# EAGLE board m0xpdLooping ADSR v2.0 (EAGLE 9.6.2)
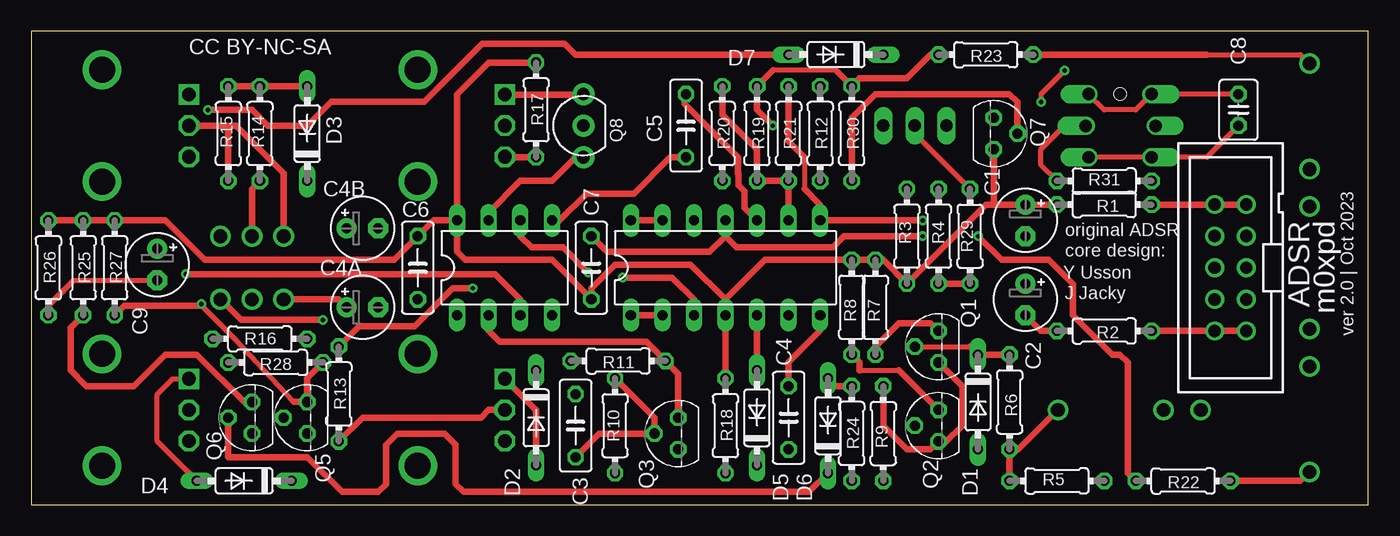
[diagram p0: board, top side]
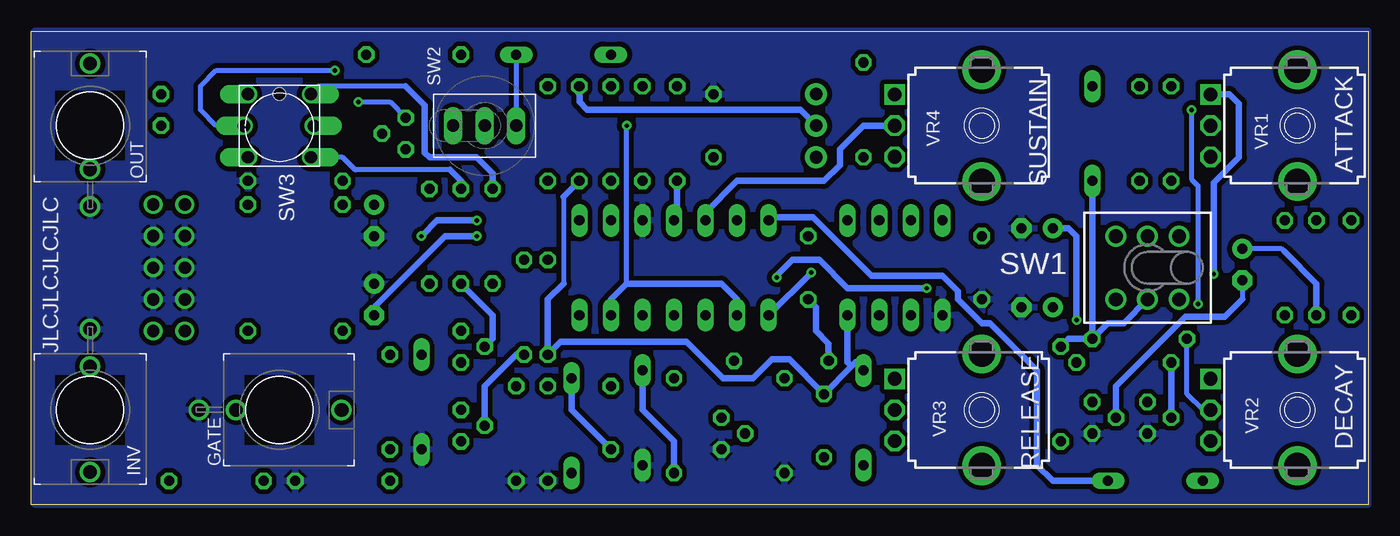
[diagram p1: board, bottom side, seen from below]

Size 107.62 x 38.09 mm. Coordinates in mm from the lower left corner, seen from the top.
Outline: 0,0 107.62,0 107.62,38.09 0,38.09 0,0
Copper layers (1*16): Top 0.035mm / dielectric 1.5mm / Bottom 0.035mm
Design rules "default *": minimum track width 6mil, minimum drill 0.35mm, track to track 15mil, track to pad 15mil, pad to pad 6mil, via to via 6mil, smd to smd 6mil, copper to edge 0mil, drill to drill 6mil, minimum pad ring 10mil, minimum via ring 8mil, stop-mask expansion 4mil, vias tented up to drill 0mil, thermal gap 10mil

## Footprints (pad centres in the part's own frame; a part is rotated, then mirrored left to right if it is on the bottom)
E2,5-5 = drill 0.813 pad 1.6: + -1.27,0 | drill 0.813 pad 1.6 octagon: - 1.27,0
C050-025X075 = drill 0.813 octagon: 1 -2.54,0; 2 2.54,0
C025-030X050 = drill 0.813 octagon: 1 -1.27,0; 2 1.27,0
DO35-7 = drill 0.813 long: A 3.81,0; C -3.81,0
WQP-PJ301M-12_JACK = drill 1.1: P$1_TIP 0,5; P$2_SWITCH 0,-3.5; P$3_SLEEVE 0,-6.5
DIL14 = drill 0.813 long: 1 -7.62,-3.81; 2 -5.08,-3.81; 3 -2.54,-3.81; 4 0,-3.81; 5 2.54,-3.81; 6 5.08,-3.81; 7 7.62,-3.81; 8 7.62,3.81; 9 5.08,3.81; 10 2.54,3.81; 11 0,3.81; 12 -2.54,3.81; 13 -5.08,3.81; 14 -7.62,3.81
DIL08 = drill 0.813 pad 1.27 long: 1 -3.81,-3.81; 2 -1.27,-3.81; 3 1.27,-3.81; 4 3.81,-3.81; 5 3.81,3.81; 6 1.27,3.81; 7 -1.27,3.81; 8 -3.81,3.81
TO92 = drill 0.813 octagon: 1 1.27,0; 2 0,1.905; 3 -1.27,0
TO92' = drill 1.016 pad 1.778: 1 -2.54,0; 2 0,0; 3 2.54,0
0204/7 = drill 0.813 octagon: 1 -3.81,0; 2 3.81,0
TL4XPO = drill 1.1 pad 1.676: 1 -2.54,2.54; 2 0,2.54; 3 2.54,2.54; 4 -2.54,-2.54; 5 0,-2.54; 6 2.54,-2.54
SUBMINI_TOGGLE = drill 1 pad 1.422 long: 1 -2.54,0; 3 2.54,0; COM 0,0
LOW_PROFILE_BUTTON = drill 1 offset: L$1 -2.875,-0.02; L$2 2.76,-0.02; P$1 2.54,-2.54; P$2 -2.54,-2.54; P$3 2.54,2.54; P$4 -2.54,2.54 | hole 1: 0,2.54
9MM_SNAP-IN_POT = drill 1.1 square: 1 -2.5,-7 | drill 1.1 octagon: 2 0,-7; 3 2.5,-7 | drill 2.1 pad 2.794: CHASSIS1 -4.5,0; CHASSIS2 4.5,0
PAK100/2500-10 = drill 1 pad 1.422: 1 -5.08,-1.27; 2 -5.08,1.27; 3 -2.54,-1.27; 4 -2.54,1.27; 5 0,-1.27; 6 0,1.27; 7 2.54,-1.27; 8 2.54,1.27; 9 5.08,-1.27; 10 5.08,1.27

## Placement (x,y rotation side)
C1  22u  [E2,5-5]  80.01,22.86 270 top
C2  22u  [E2,5-5]  80.01,16.51 270 top
C3  10n  [C050-025X075]  43.81,6.35 270 top
C4  100n  [C050-025X075]  60.96,6.99 90 top
C4A  10u  [E2,5-5]  26.67,15.88 0 top
C4B  1u  [E2,5-5]  26.67,22.23 0 top
C5  10n  [C050-025X075]  52.7,30.48 270 top
C6  100n  [C050-025X075]  31.11,19.05 270 top
C7  100n  [C050-025X075]  45.09,19.05 90 top
C8  100n  [C025-030X050]  97.16,31.75 270 top
C9  1u  [E2,5-5]  10.16,19.3 270 top
D1  1N4148DO35-7  [DO35-7]  76.2,8.26 270 top
D2  1N4148DO35-7  [DO35-7]  40.64,6.99 270 top
D3  1N4148DO35-7  [DO35-7]  22.23,29.84 90 top
D4  1N4148DO35-7  [DO35-7]  17.14,1.91 180 top
D5  1N4148DO35-7  [DO35-7]  58.42,6.99 90 top
D6  1N4148DO35-7  [DO35-7]  64.14,6.35 90 top
D7  1N4148DO35-7  [DO35-7]  64.77,36.2 180 top
GATE  THONKICONNNEW  [WQP-PJ301M-12_JACK]  87.63,7.62 270 bottom
IC1  TL074P  [DIL14]  55.88,19.05 0 top
IC2  7555  [DIL08]  38.1,19.05 0 top
INV  THONKICONNNEW  [WQP-PJ301M-12_JACK]  102.87,7.62 180 bottom
OUT  THONKICONNNEW  [WQP-PJ301M-12_JACK]  102.87,30.48 0 bottom
Q1  2N3904  [TO92]  73.03,12.7 90 top
Q2  2N3904  [TO92]  73.03,6.35 90 top
Q3  2N3904  [TO92]  52.07,5.71 90 top
Q5  2N3904  [TO92]  22.23,6.99 90 top
Q6  2N3904  [TO92]  17.78,6.99 90 top
Q7  2N3904  [TO92]  77.47,29.84 270 top
Q8  2N7000  [TO92']  44.45,30.48 90 top
R1  10  [0204/7]  86.36,24.13 0 top
R2  10  [0204/7]  86.36,13.97 0 top
R3  10k  [0204/7]  70.48,21.59 90 top
R4  47k  [0204/7]  73.03,21.59 90 top
R5  1M2  [0204/7]  82.55,1.91 180 top
R6  100k  [0204/7]  78.74,8.26 270 top
R7  22k  [0204/7]  67.94,15.88 270 top
R8  22k  [0204/7]  66.04,15.88 270 top
R9  10  [0204/7]  68.58,5.71 270 top
R10  22k  [0204/7]  46.99,6.35 270 top
R11  22k  [0204/7]  47.24,11.56 0 top
R12  1M  [0204/7]  63.5,29.84 90 top
R13  100  [0204/7]  24.77,8.89 90 top
R14  120  [0204/7]  18.41,29.84 90 top
R15  680  [0204/7]  15.88,29.84 90 top
R16  100  [0204/7]  18.41,13.34 0 top
R17  4k7  [0204/7]  40.64,31.75 90 top
R18  68k  [0204/7]  55.88,6.35 90 top
R19  100k  [0204/7]  58.42,29.84 90 top
R20  150k  [0204/7]  55.63,29.84 90 top
R21  100k  [0204/7]  60.96,29.84 90 top
R22  1k  [0204/7]  92.71,1.91 0 top
R23  1k  [0204/7]  76.83,36.2 0 top
R24  10k  [0204/7]  66.04,5.71 90 top
R25  10k  [0204/7]  4.19,19.05 90 top
R26  150k  [0204/7]  1.4,19.05 90 top
R27  10k  [0204/7]  6.73,19.05 90 top
R28  10k  [0204/7]  19.68,11.43 180 top
R29  2k2  [0204/7]  75.56,21.59 270 top
R30  12k  [0204/7]  66.04,29.84 90 top
R31  2k2  [0204/7]  86.36,26.04 180 top
SW1  TL46PO  [TL4XPO]  17.78,19.05 180 bottom
SW2  SUBMINI_SPDT  [SUBMINI_TOGGLE]  71.12,30.48 0 bottom
SW3  THONK_LED_BUTTON  [LOW_PROFILE_BUTTON]  87.63,30.48 0 bottom
VR1  1MLOG  [9MM_SNAP-IN_POT]  5.71,30.48 270 bottom
VR2  1MLOG  [9MM_SNAP-IN_POT]  5.71,7.62 270 bottom
VR3  1MLOG  [9MM_SNAP-IN_POT]  31.11,7.62 270 bottom
VR4  10kLIN  [9MM_SNAP-IN_POT]  31.11,30.48 270 bottom
X1  2510-  [PAK100/2500-10]  96.52,19.05 90 top

## Library data of the parts
C1-C4 C4A C4B C5-C9 = rcl; SPICEPREFIX: C
D1-D7 = diode
GATE INV OUT VR1-VR4 = MusicThingModular
IC1 = linear
IC2 SW2 SW3 = MyLibrary
Q1-Q3 Q5-Q7 = transistor-npn
Q8 = transistors-FET
R1-R31 = rcl; SPICEPREFIX: R
SW1 = switch
X1 = con-3m; MF: 3M; MPN: 2510-6002UB; OC_FARNELL: 9838244; OC_NEWARK: 46F4725

## Nets
+12V: C1.+ C6.1 C7.1 IC1.4 IC2.8 Q7.1 R1.1 R3.1 R7.1 R8.1 R11.1 R17.2 R18.2 R25.2 R26.2 R27.2
-12V: C2.- C7.2 IC1.11 R2.1 R20.1
GND: C1.- C2.+ C4A.- C4B.- C5.1 C6.2 D1.A D5.C GATE.P$3_SLEEVE IC1.10 IC2.1 INV.P$3_SLEEVE OUT.P$3_SLEEVE Q3.3 Q5.3 Q6.3 R5.1 R9.2 R10.2 R24.1 R31.1 X1.3 X1.4 X1.5 X1.6 X1.7 X1.8
LED+: Q7.3 SW3.L$1
LED-: R31.2 SW3.L$2
N$1: R1.2 X1.9 X1.10
N$2: GATE.P$1_TIP R5.2 R6.2
N$3: D1.C Q1.2 R4.1 R6.1 R29.2
N$4: Q1.3 Q2.3 R9.1
N$5: R2.2 X1.1 X1.2
N$6: IC2.3 VR1.1
N$7: Q1.1 Q2.2 R7.2
N$8: C3.2 Q3.2 R10.1
N$9: IC2.2 Q3.1 R11.2
N$10: C5.2 IC2.5
N$11: C3.1 D2.C IC2.4 Q2.1 R8.2 R12.1
N$12: Q8.2 R12.2
N$13: IC2.7 Q8.1
N$14: D2.A VR3.1
N$15: Q8.3 VR4.1
N$16: R17.1 VR4.3
N$17: R13.1 VR3.2
N$18: R15.1 SW1.6 VR1.2
N$19: R14.1 SW1.5
N$20: D3.A R14.2 R15.2
N$21: D3.C IC1.3 R13.2 R16.2 SW1.2
N$22: R16.1 VR2.2
N$23: C4A.+ SW1.3
N$24: C4B.+ SW1.1
N$25: IC1.1 IC1.2 IC1.6 IC2.6 R19.2 R23.1 R30.2
N$26: IC1.12 VR4.2
N$27: D4.C IC1.13 IC1.14
N$28: D4.A VR2.1
N$29: D5.A IC1.5 R18.1
N$30: IC1.9 R19.1 R20.2 R21.1
N$31: C4.2 IC1.7
N$32: IC1.8 R21.2 R22.1
N$33: INV.P$1_TIP R22.2
N$34: OUT.P$1_TIP R23.2
N$35: C8.1 R3.2 SW3.P$3 SW3.P$4
N$36: C8.2 R4.2 SW3.P$1 SW3.P$2
N$37: C4.1 D6.A R24.2
N$38: D7.A Q5.1 R27.1 R28.1
N$39: C9.+ Q6.1 R25.1
N$40: R29.1 SW2.COM
N$41: C9.- Q5.2 R26.1
N$42: D7.C SW2.3
N$43: D6.C Q6.2 R28.2
N$45: Q7.2 R30.1

## Tracks (layer width: path | path; a pad name or v marks a point on that pad's centre or on a via)
+12V
  Top 0.508: 55.88,16.51 53.09,19.3 46.99,19.3 45.09,17.4 C7.1 41.91,19.68 34.92,19.68 34.29,20.32 IC2.8 | 77.47,24.13 C1.+ R1.1 | 77.47,24.13 76.83,24.13 R3.1 68.58,19.68 R7.1 R8.1 59.05,19.68 55.88,16.51 | 55.88,16.51 IC1.4 R18.2 | R26.2 R25.2 R27.2 10.79,22.86 13.97,19.68 29.21,19.68 C6.1 32.38,22.86 IC2.8 | R17.2 36.83,35.56 34.29,33.02 IC2.8 | Q7.1 77.47,24.13
  Bottom 0.508: C7.1 44.45,15.88 44.45,13.97 43.43,12.95 R11.1
-12V  (via drill 0.35)
  Top 0.508: R2.1 81.28,13.97 C2.- | 55.88,21.59 54.61,20.32 46.35,20.32 C7.2 | IC1.11 55.88,21.59 | 55.88,21.59 56.77,20.7 64.52,20.7 65.41,21.59 v71.75,21.59
  Bottom 0.508: R20.1 55.63,23.11 IC1.11 | v71.75,21.59 74.3,21.59 80.01,15.88 C2.-
GND
  Top 0.508: IC1.10 57.4,23.88 57.4,25.22 56.92,25.7 56.92,26.57 56.9,26.6 56.9,27.94 52.58,32.26 52.58,32.89 C5.1
  pour Bottom: 0,38.1 107.31,38.1 107.31,0 0,0
LED+  (via drill 0.35)
  Top 0.406: v83.19,34.92 81.28,33.02 v81.28,32.38
  Bottom 0.406: SW3.L$1 90.53,30.48 92.71,30.48 93.98,31.75 93.98,33.66 92.71,34.92 v83.19,34.92 | v81.28,32.38 78.74,32.38 Q7.3
LED-
  Top 0.406: R31.2 81.28,27.3 81.28,28.57 83.17,30.46 SW3.L$2
N$1
  Top 0.508: X1.9 X1.10 R1.2
N$2
  Top 0.508: GATE.P$1_TIP 79.45,4.45 78.82,4.45 | 78.82,4.45 R6.2 | R5.2 78.74,4.37 78.82,4.45
N$3
  Top 0.406: Q1.2 75.56,12.7
  Top 0.508: R4.1 R29.2 | 75.56,12.7 D1.C R6.1
  Bottom 0.508: Q1.2 70.48,13.34 70.48,15.24 R4.1
N$4
  Top 0.508: Q1.3 74.93,9.53 74.93,6.35 73.66,5.08 Q2.3 72.39,4.45 70.48,4.45 68.58,6.35 R9.1
N$5
  Top 0.508: X1.1 X1.2 R2.2
N$6  (via drill 0.35)
  Top 0.508: IC2.3 39.37,16.51 37.34,18.54 v12.45,18.54
  Bottom 0.508: v12.45,18.54 12.45,25.91 10.41,27.94 10.41,32.26 11.18,33.02 12.45,33.02 12.49,32.98 VR1.1
N$7
  Top 0.508: R7.2 67.94,12.7 69.85,14.61 72.39,14.61 Q1.1
  Bottom 0.508: R7.2 68.58,12.06 71.12,9.53 Q2.2
N$8
  Top 0.508: C3.2 45.72,5.71 Q3.2 50.16,6.99 R10.1
N$9
  Top 0.508: Q3.1 52.07,10.54 R11.2 49.53,13.08 37.72,13.08 36.83,13.97 IC2.2
N$10
  Top 0.508: IC2.5 42.55,22.86 44.7,25.02 48.51,25.02 51.44,27.94 C5.2
N$11
  Top 0.406: 66.67,10.79 69.85,10.79
  Top 0.508: R8.2 66.67,11.43 66.67,10.79 | 69.85,10.79 Q2.1
  Bottom 0.406: 64.77,24.77 64.77,17.78
  Bottom 0.508: D2.C 41.27,11.43 41.59,11.11 | 41.59,11.11 41.91,11.43 IC2.4 | 41.59,11.11 C3.1 46.61,11.68 48.01,11.68 49.53,10.16 51.94,10.16 54.86,13.08 65.02,13.08 R8.2 66.04,16.51 64.77,17.78 | R12.1 64.77,24.77
N$12
  Bottom 0.508: Q8.2 45.72,31.75 62.87,31.75 63.5,32.38 R12.2
N$13
  Top 0.508: IC2.7 36.83,23.5 39.37,26.04 41.91,26.04 43.81,27.94 Q8.1
N$14
  Top 0.508: VR3.1 40.62,7.62 40.64,7.62 D2.A
N$15
  Top 0.508: VR4.1 44.41,32.98 Q8.3
N$16
  Top 0.508: R17.1 38.16,27.94 VR4.3
N$17
  Top 0.508: R13.1 26.67,6.99 36.2,6.99 36.83,7.62 VR3.2
N$18
  Top 0.508: SW1.6 20.32,26.67 16.51,30.48 15.88,30.48 | 15.88,30.48 VR1.2 | R15.1 15.88,30.48
N$19
  Top 0.508: SW1.5 17.78,25.4 R14.1
N$20
  Top 0.508: D3.A R14.2 R15.2
N$21  (via drill 0.35)
  Top 0.508: R13.2 26.42,14.35 30.86,14.35 33.91,17.4 v35.56,17.4 | v47.62,18.27 51.59,18.27 53.34,16.51 IC1.3
  Bottom 0.508: D3.C R16.2 | SW1.2 19.68,14.61 20.95,14.61 R16.2 | R16.2 24.13,13.34 R13.2 | v35.56,17.4 41.91,17.4 44.2,19.68 46.35,19.68 47.62,18.41 v47.62,18.27
N$22
  Bottom 0.406: 13.34,7.62 14.61,8.89 R16.1
  Bottom 0.508: VR2.2 13.34,7.62
N$23
  Top 0.508: SW1.3 24.77,16.51 C4A.+
N$24  (via drill 0.35)
  Top 0.508: v23.5,14.86 16.89,14.86 SW1.1
  Bottom 0.508: C4B.+ 24.13,22.23 23.5,21.59 v23.5,14.86
N$25  (via drill 0.35)
  Top 0.406: 64.77,34.92 59.69,34.92
  Top 0.508: IC1.1 IC1.2 | 59.69,34.92 R19.2 58.42,31.75 v59.69,30.48 | 64.77,34.92 R30.2 66.67,34.29 70.48,34.29 72.39,36.2 R23.1 | IC2.6 39.37,21.59 40.26,20.7 42.8,20.7 v44.83,18.67
  Bottom 0.406: 59.69,17.78 v59.69,30.48
  Bottom 0.508: IC1.2 50.8,16.51 52.07,17.78 59.69,17.78 60.96,16.51 IC1.6 | v44.83,18.67 IC1.1
N$26
  Bottom 0.508: VR4.2 40.64,30.48 42.55,28.57 42.55,27.3 43.81,26.04 50.8,26.04 53.34,23.5 IC1.12
N$27
  Top 0.508: IC1.13 IC1.14
  Bottom 0.508: IC1.14 48.01,23.11 44.7,23.11 40.01,18.41 34.29,18.41 33.02,17.14 33.02,16.51 31.11,14.61 30.48,14.61 26.67,10.79 26.67,3.17 25.4,1.91 D4.C
N$28
  Top 0.406: 12.71,2.52 10.16,5.08 10.16,8.89 11.39,10.12 VR2.1
  Top 0.508: D4.A 12.71,2.52
N$29
  Top 0.508: IC1.5 D5.A
  Bottom 0.508: D5.A 58.42,7.62 55.88,5.08 R18.1
N$30
  Top 0.508: IC1.9 R21.1 R19.1 58.42,28.57 55.63,31.37 R20.2
N$31
  Top 0.508: C4.2 60.96,11.43 63.5,13.97 IC1.7
N$32  (via drill 0.35)
  Top 0.406: 62.23,27.94 62.23,25.4
  Top 0.508: v71.75,22.86 IC1.8 63.5,24.13 62.23,25.4 | v76.2,21.59 78.11,19.68 81.92,19.68 83.82,17.78 83.82,15.24 87,12.06 87.63,12.06 88.27,11.43 88.27,2.54 R22.1 | 62.23,27.94 60.96,29.21 R21.2
  Bottom 0.508: v71.75,22.86 74.93,22.86 v76.2,21.59
N$33
  Top 0.508: INV.P$1_TIP 102.16,1.91 R22.2
N$34
  Top 0.406: 94.61,36.2 102.16,36.2 OUT.P$1_TIP
  Top 0.508: R23.2 94.61,36.2
N$35
  Top 0.406: C8.1 SW3.P$4 88.9,31.75 86.36,31.75 SW3.P$3
  Bottom 0.406: 77.47,33.66 84.45,33.66 SW3.P$3
  Bottom 0.508: R3.2 70.48,26.67 71.75,27.94 75.56,27.94 75.95,28.32 75.95,32.13 77.47,33.66
N$36
  Top 0.406: C8.2 94.61,27.94 SW3.P$2 SW3.P$1
  Bottom 0.406: SW3.P$1 82.55,27.94 81.53,26.92 73.91,26.92
  Bottom 0.508: R4.2 73.03,26.04 73.91,26.92
N$37
  Top 0.508: R24.2 64.77,9.53 D6.A
  Bottom 0.508: D6.A 64.14,7.62 C4.1
N$38  (via drill 0.35)
  Top 0.406: 21.13,8.26 16.51,13.21 13.97,15.75 v13.72,16.13
  Top 0.508: 21.13,8.26 Q5.1 22.23,10.16 R28.1 | D7.A 43.81,36.2 42.94,37.07 36.31,37.07 31.62,32.38 24.13,32.38 22.23,30.48 19.05,30.48 17.78,31.75 v14.22,31.75 | v13.72,16.13 13.59,16 7.49,16 R27.1
  Bottom 0.406: 14.25,31.73 14.25,26.19 13.72,25.65 13.72,16.16 | 13.79,16.2 13.72,16.16 | 13.72,16.16 v13.72,16.13
  Bottom 0.508: 14.25,31.73 v14.22,31.75
N$39
  Top 0.508: Q6.1 17.14,8.26 13.34,12.06 10.79,12.06 8.26,9.53 4.45,9.53 3.17,10.79 3.17,14.22 R25.1
  Bottom 0.406: 6.73,20.32 6.99,20.57 C9.+
  Bottom 0.508: R25.1 4.19,17.78 6.73,20.32
N$40
  Top 0.406: R29.1 71.12,29.84 SW2.COM
N$41
  Top 0.406: 2.54,17.14 3.43,18.03 C9.-
  Top 0.508: 2.54,17.14 1.4,16 R26.1
  Bottom 0.406: C9.- 10.16,16.51
  Bottom 0.508: Q5.2 20.32,9.53 14.73,15.11 11.56,15.11 10.16,16.51
N$42
  Bottom 0.406: D7.C SW2.3
N$43
  Top 0.508: D6.C 62.61,1.02 34.8,1.02 34.16,1.65 34.16,4.83 33.27,5.71 29.46,5.71 28.57,4.83 28.57,1.65 27.94,1.02 25.02,1.02 22.23,3.81 15.88,3.81 Q6.2
  Bottom 0.508: Q6.2 R28.2
N$45
  Top 0.508: R30.1 66.04,31.11 67.94,33.02 78.74,33.02 79.38,32.38 Q7.2

## Text on the board
tNames: CC BY-NC-SA | original ADSR | core design: | Y Usson | J Jacky | ADSR | m0xpd | ver 2.0 | Oct 2023
bNames: SUSTAIN | ATTACK | JLCJLCJLCJLC | RELEASE | DECAY